# Altium PCB Motor_Control_PCB.PcbDoc
Units mil, origin at the board's own origin, x right, y up, seen from the top; angles counter-clockwise.
Board outline 3937.01 x 3018.63 mil, 2 copper layers (Top Layer, Bottom Layer); 22 components, 17 nets, 91 pads, 21 vias.
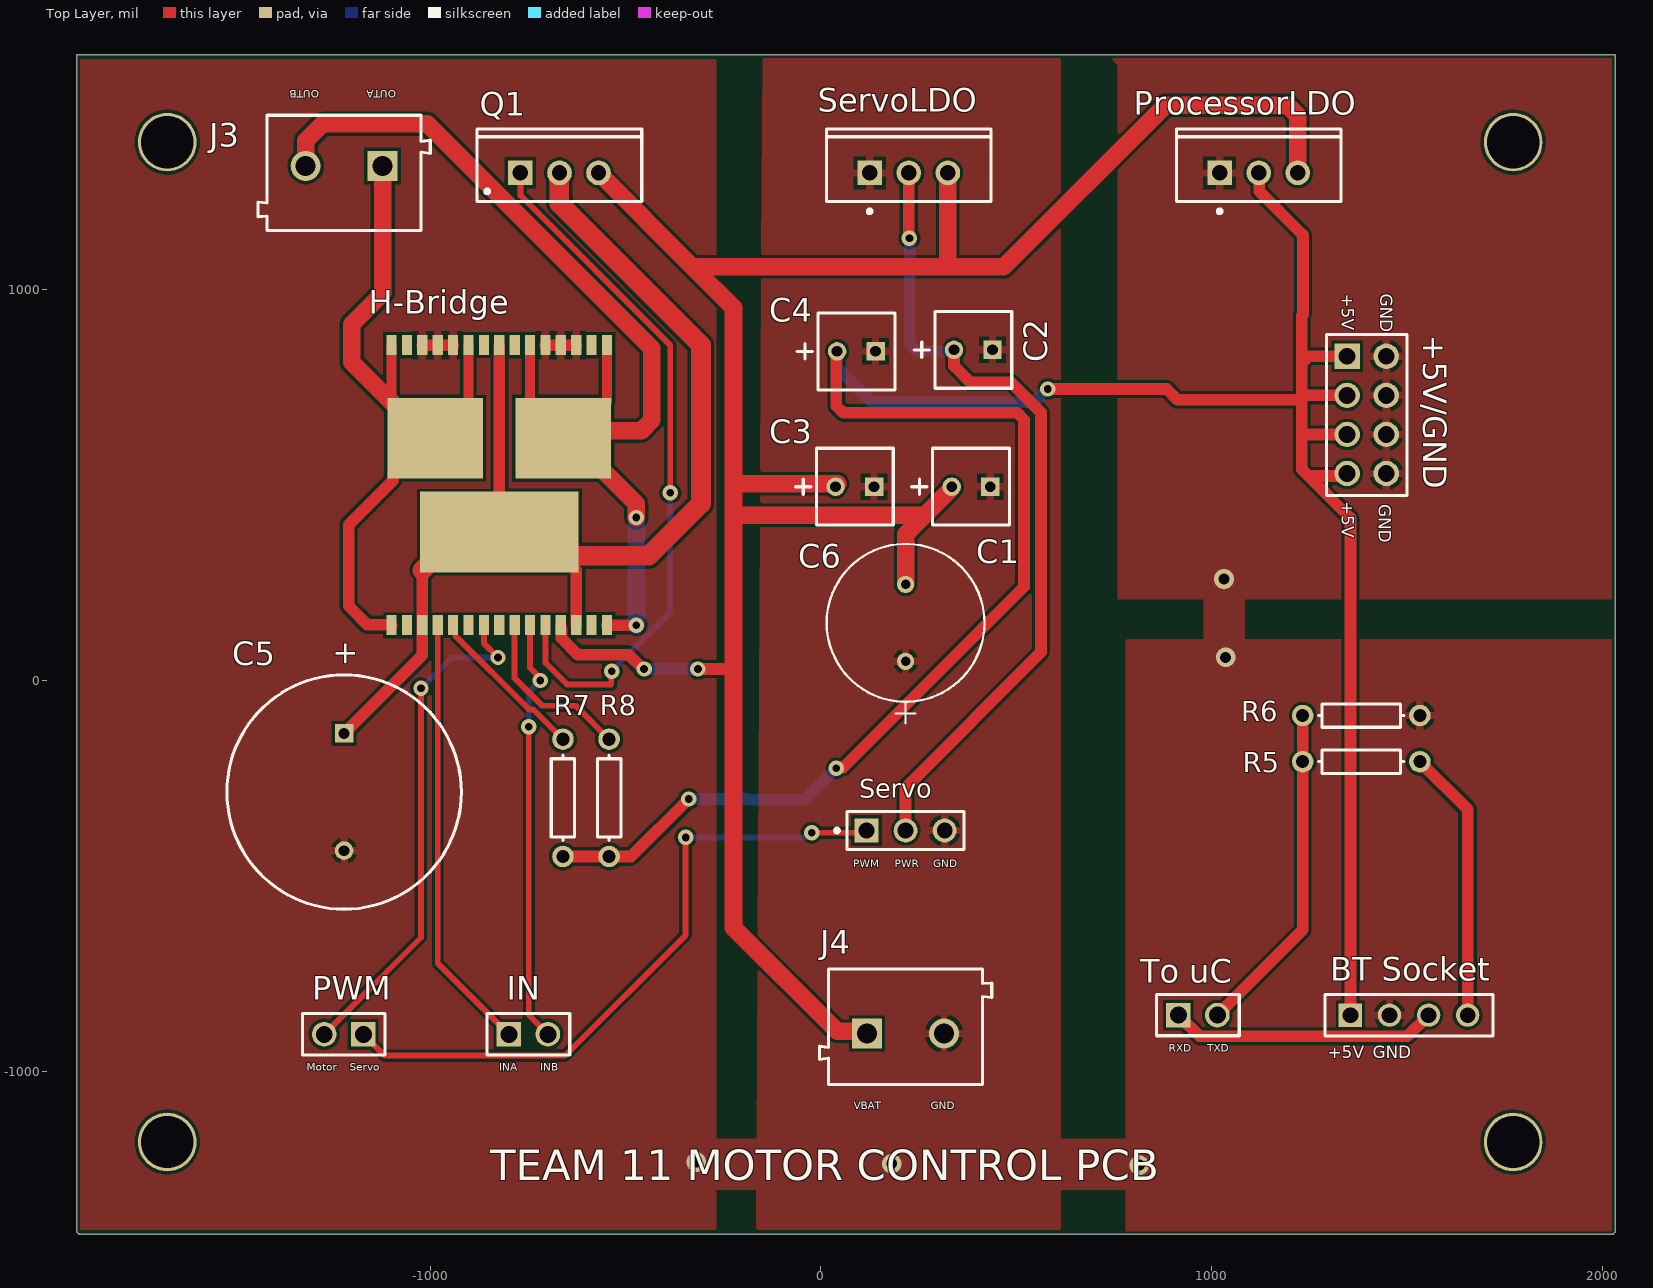
[diagram p0: Top Layer view]
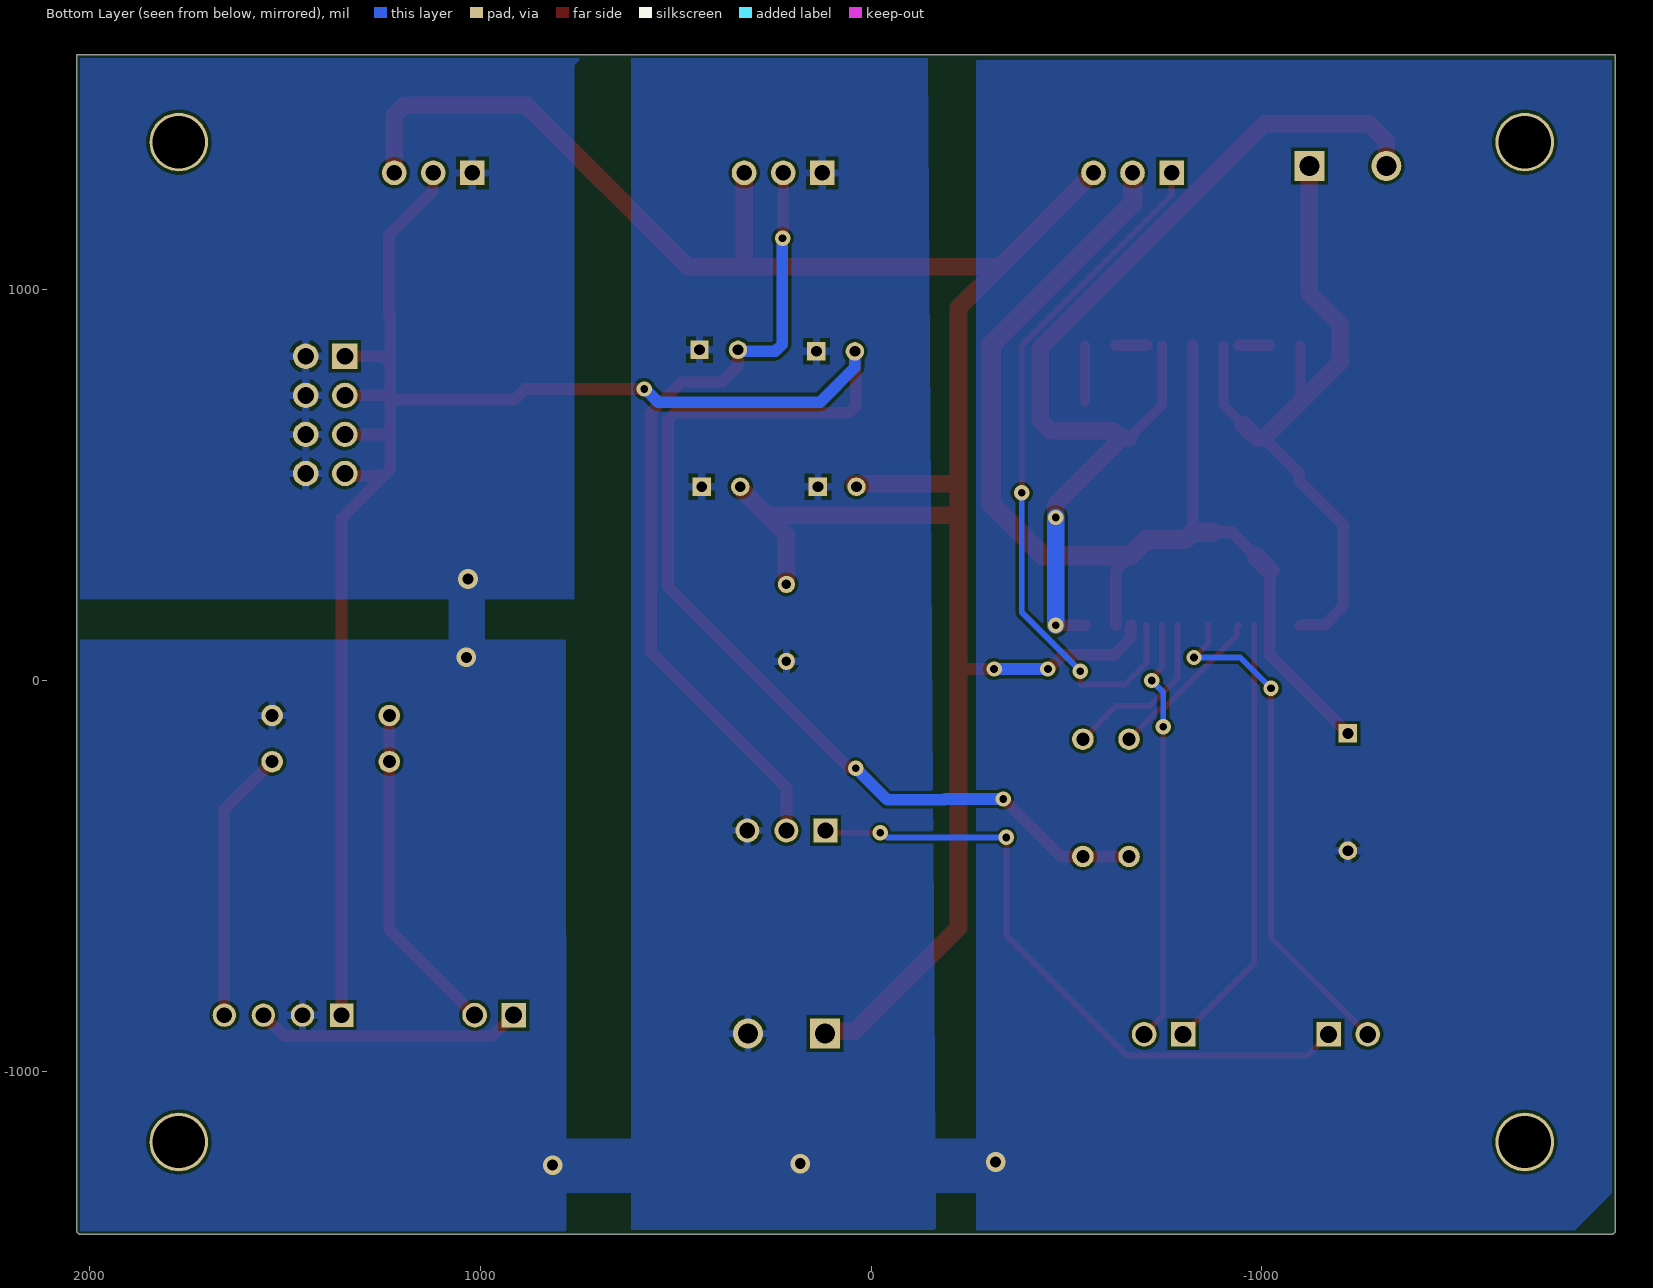
[diagram p1: Bottom Layer view, seen from below]
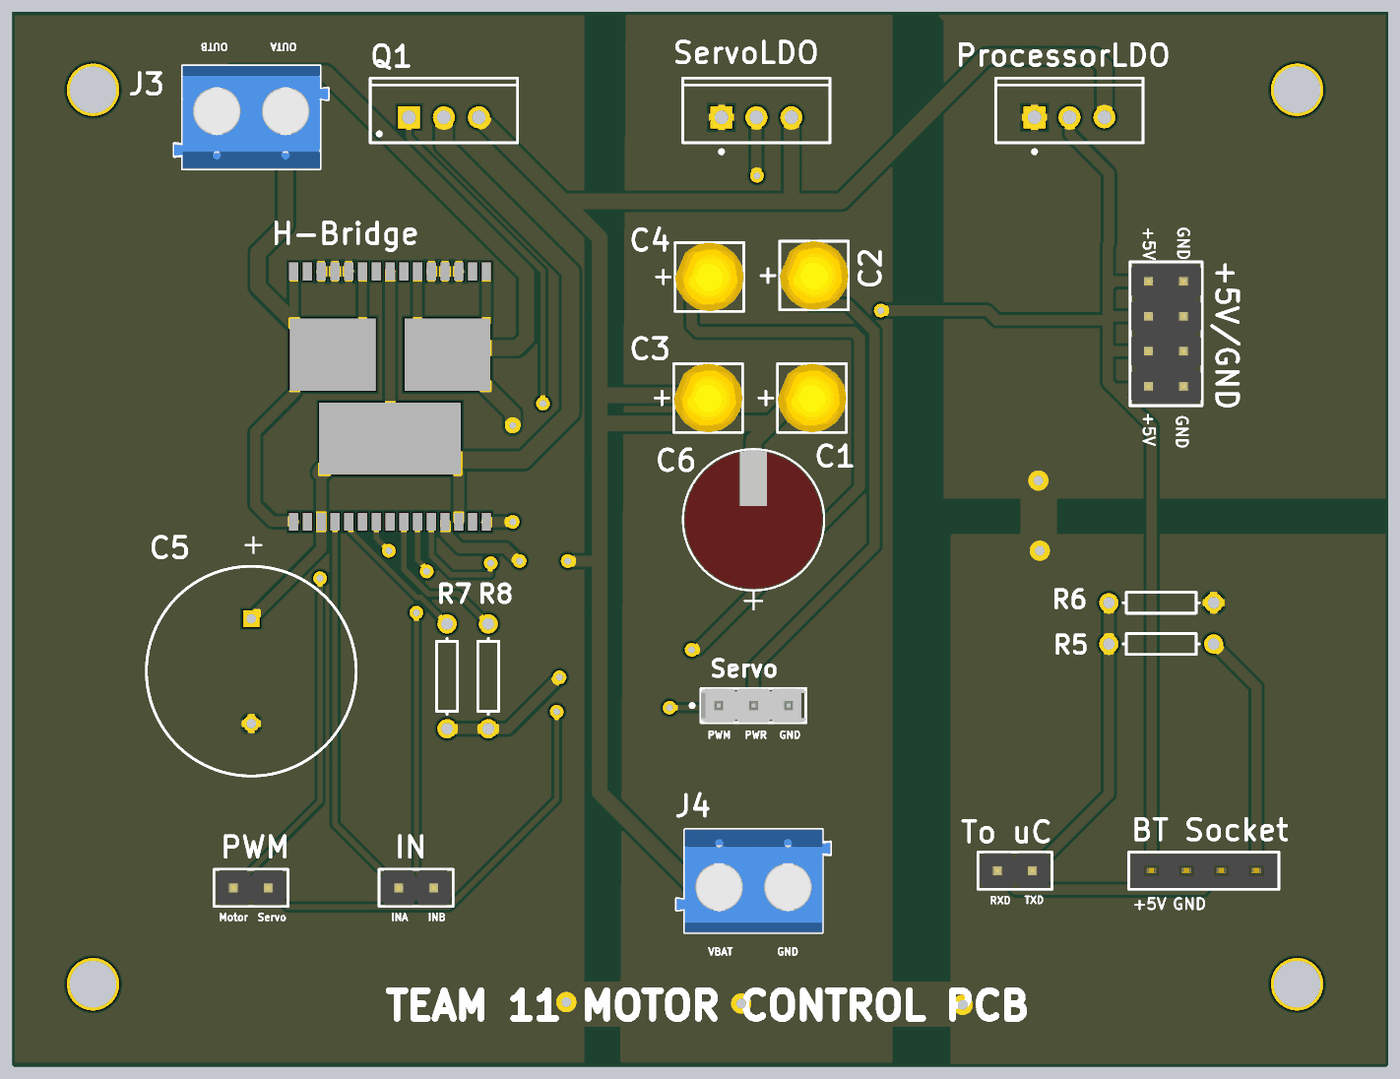
[diagram p2: 3D render of the assembled board from above, using the file's embedded part models]

## Layer stack, top to bottom
Top Solder: solder mask 0.4, Solder Resist, Dk 3.5
Top Layer: signal copper 1.4
Dielectric 1: dielectric 12.6, FR-4, Dk 4.8
Bottom Layer: signal copper 1.4
Bottom Solder: solder mask 0.4, Solder Resist, Dk 3.5

## Board outline
-1898.59,-1417.32 -1904.45,-1411.46 -1904.45,1601.31 2032.56,1601.31 2032.56,-1411.46 2026.7,-1417.32

## Design rules (kind name [scope] priority, off if disabled: settings)
BoardOutlineClearance [All] p1: gap=7.87 ignorepadtopadclearanceinfootprint=FALSE except(15.75: Arc-SplitBarrior Arc-SplitContinuation Track-SplitBarrior Track-SplitContinuation SMDPad-SplitBarrior SMDPad-SplitContinuation THPad-SplitBarrior THPad-SplitContinuation Via-SplitBarrior Via-SplitContinuation Fill-SplitBarrior Fill-SplitContinuation Poly-SplitBarrior Poly-SplitContinuation Region-SplitBarrior Region-SplitContinuation Text-SplitBarrior Text-SplitContinuation)
Clearance "Clearance Bottom Layer" [OnLayer('Bottom Layer')] p1: gap=8 ignorepadtopadclearanceinfootprint=TRUE except(10: Arc-Text Track-Text SMDPad-Text THPad-Text Via-Text Fill-Text Poly-Text Region-Text Text-Text)
Clearance "Clearance Top Layer" [OnLayer('Top Layer')] p2: gap=8 ignorepadtopadclearanceinfootprint=TRUE except(10: Arc-Text Track-Text SMDPad-Text THPad-Text Via-Text Fill-Text Poly-Text Region-Text Text-Text)
Clearance [All] p3: gap=7.87 ignorepadtopadclearanceinfootprint=FALSE except(3.5: Arc-Arc Arc-Track Arc-SMDPad Track-Track Track-SMDPad SMDPad-SMDPad; 5: Arc-Via Track-Via SMDPad-Via THPad-Via Via-Via; 10: Arc-Text Track-Text SMDPad-Text THPad-Text Via-Text Fill-Text Poly-Text Region-Text Text-Text)
HoleSize [All] p1: absolutevalues=TRUE maxlimit=248.03 minlimit=7.87 maxpercent=80.000 minpercent=20.000
MinimumAnnularRing [All] p1: minimumring=3
MinimumSolderMaskSliver [All] p1: minsoldermaskwidth=3.94
PolygonConnect PolygonConnect_1 [All] p1: thpad.connectstyle=Relief thpad.reliefconductorwidth=20 thpad.reliefentries=4 thpad.polygonreliefangle="90 Angle" thpad.airgapwidth=10 smdpad.connectstyle=Relief smdpad.reliefconductorwidth=20 smdpad.reliefentries=4 smdpad.polygonreliefangle="90 Angle" smdpad.airgapwidth=10 via.connectstyle=Direct via.reliefconductorwidth=20 via.reliefentries=4 via.polygonreliefangle="90 Angle" via.airgapwidth=10
RoutingCorners [All] p1: cornerstyle=Round minsetback=100 maxsetback=100
RoutingVias [All] p1: holewidth=19.68 width=39.37 viastyle="Through Hole" minholewidth=7.87 minwidth=17.72 maxholewidth=39.37 maxwidth=78.74
SilkToSilkClearance [All] p1: silktosilkclearance=3.94
SilkToSolderMaskClearance [IsPad] p1: minsilkscreentomaskgap=3.94 clearancetoexposedcopper=TRUE
SolderMaskExpansion [All] p1: expansion=4 istentingtop=FALSE
Width [All] p1: maxlimit=100 minlimit=3.5 preferedwidth=15
25 further rules are at their usual default settings.

## Components (designator, comment, footprint, x,y, rotation, side; value= is the part's Value field where it differs from the comment)
+5V/GND "61300821121" 61300821121 1396.85,679.92 r270 top
"BT Socket" "61300411821" 61300411821 1505.12,-856.3 r0 top
C1 "TAP106K016SCS" FP-TAP106K016SCS-MFG 383.86,496.06 r180 top
C2 "TAP106K016SCS" FP-TAP106K016SCS-MFG 389.76,846.46 r180 top
C3 "TAP106K016SCS" FP-TAP106K016SCS-MFG 86.61,496.06 r180 top
C4 "TAP106K016SCS" FP-TAP106K016SCS-MFG 90.55,842.52 r180 top
C5 "Cap Pol1" RB7.6-15 -1220.47,-285.43 r90 top value=1uF
C6 "MAL219055102E3" CAP_5102E3_VIS 216.54,49.21 r90 top
H-Bridge "H_Bridge Motor Driver" "H-bridge Motor Driver (Lab1)" -823.43,500 r0 top (schematic designator *1)
IN "61300211121" 61300211121 -748.82,-905.51 r0 top
J3 "691102710002" 691102710002 -1220.47,1299.21 r180 top
J4 "691102710002" 691102710002 216.54,-885.83 r0 top
ProcessorLDO "LM1084IT-5.0/NOPB" NDE0003A 1120.47,1299.21 r0 top
PWM "61300211121" 61300211121 -1221.26,-905.51 r180 top
Q1 "NMOS-2" TO-220AB -669.29,1299.21 r0 top
R5 "Res1" AXIAL-0.3 1382.87,-207.68 r0 top value=1K
R6 "Res1" AXIAL-0.3 1382.87,-89.57 r180 top value=2K
R7 "Res1" AXIAL-0.3 -660.43,-300.2 r270 top value=3.3K
R8 "Res1" AXIAL-0.3 -542.32,-300.2 r270 top value=3.3K
Servo "22-28-4033" MOLX-22-28-4033_V 216.54,-383.86 r0 top
ServoLDO "LM1084IT-5.0/NOPB" NDE0003A 224.8,1299.21 r0 top
"To uC" "61300211121" 61300211121 964.57,-856.3 r0 top

## Footprints (in the part's own frame and the unit in brackets; to place one, negate y for a bottom-side part, rotate by r counter-clockwise, add the part's x,y. Pads: shape width x height; smd on the part's side, far side on the other; paste and mask are expansions set on the pad)
61300211121 [mm] "Pin Header, pitch 2.54 mm, THT, Vertical, single row, 2p"
  rect 1.6x1.6 hole 1.1: 1(-1.27,0)
  round 1.6 hole 1.1: 2(1.27,0)
  silkscreen extent -2.69,-1.35 2.69,1.35, body extent -2.54,-1.27 2.54,1.27, height 8.57
61300411821 [mm] "Socket Header, Pitch 2.54 mm, THT, Vertical, single row, 4p"
  rect 1.52x1.52 hole 1.02: 1(-3.81,0)
  round 1.52 hole 1.02: 2(-1.27,0) 3(1.27,0) 4(3.81,0)
  silkscreen extent -5.46,-1.35 5.46,1.35, body extent -5.33,-1.25 5.33,1.25, height 8.55
61300821121 [mm] "Pin Header, pitch 2.54 mm, THT, Vertical, dual row, 8p"
  rect 1.65x1.65 hole 1.1: 1(-3.81,-1.27)
  round 1.65 hole 1.1: 2(-3.81,1.27) 3(-1.27,-1.27) 4(-1.27,1.27) 5(1.27,-1.27) 6(1.27,1.27) 7(3.81,-1.27) 8(3.81,1.27)
  silkscreen extent -5.23,-2.62 5.23,2.62, body extent -5.08,-2.54 5.08,2.54, height 8.59
691102710002 [mm] "5,00mm - modular - blue - Horizontal entry with pressure clamp - 9,9 mm height - 02p"
  rect 1.95x1.95 hole 1.3: 1(-2.5,-0.45)
  round 1.95 hole 1.3: 2(2.5,-0.45)
  silkscreen extent -5.6,-3.75 5.6,3.75, body extent -5.6,-3.75 5.6,3.75, height 9.96
AXIAL-0.3 [mm] "Axial Device, Thru-Hole; 2 Leads; 0.3 in Pin Spacing"
  round 1.4 hole 0.85: 1(-3.81,0) 2(3.81,0)
  silkscreen extent -2.77,-0.76 2.77,0.76
CAP_5102E3_VIS [mil]
  round 44 hole 24 mask+0: 1(0,0) 2(196.85,0)
  silkscreen extent -159,-202 300,202, body extent -99,-197 296,197, height 788
FP-TAP106K016SCS-MFG [mm]
  rect 1.2x1.2 hole 0.7 paste-1000 mask+0: 1(-1.25,0)
  round 1.2 hole 0.7 paste-1000 mask+0: 2(1.25,0)
  silkscreen extent -2.5,-2.5 3.85,2.5, body extent -2.6,-2.6 2.6,2.6, height 0.25
"H-bridge Motor Driver (Lab1)" [mm]
  rect 0.665x1.3 smd: CP(3,-9.1) CS(0,-9.1) CS_DIS(-2,-9.1) EN_A/DIAG_A(-3,-9.1) EN_B/DIAG_B(1,-9.1) GND_A(-5,9.1) GND_A(-4,9.1) GND_A(-3,9.1) GND_B(3,9.1) GND_B(4,9.1) GND_B(5,9.1) IN_A(-4,-9.1) IN_B(2,-9.1) NC(-6,-9.1) NC(-6,9.1) NC(-1,9.1) NC(1,9.1) NC(6,-9.1) NC(6,9.1) OUT_A(-7,-9.1) OUT_A(-7,9.1) OUT_A(-2,9.1) OUT_B(2,9.1) OUT_B(7,-9.1) OUT_B(7,9.1) PWM(-1,-9.1) VBAT(4,-9.1) VCC(-5,-9.1) VCC(0,9.1) VCC(5,-9.1)
  rect 6.23x5.25 smd: OUT_A(-4.165,3.05) OUT_B(4.165,3.05)
  rect 10.3x5.25 smd: VCC(0,-3.05)
  body extent -8.61,-9 8.6,9, height 2.35
MOLX-22-28-4033_V [mm] "THD, 3-Leads, Body 7.62x2.49mm, Pitch 2.54mm"
  rect 1.55x1.55 hole 1.02: 1(-2.54,0)
  round 1.55 hole 1.02: 2(0,0) 3(2.54,0)
  silkscreen extent -4.58,-1.24 3.81,1.24, body extent -3.81,-1.24 3.81,1.24, height 8.38
NDE0003A [mm] "FM, 3-Leads, Body 10.7x4.7mm, Pitch 2.54mm"
  rect 1.6x1.6 hole 1: 1(-2.54,0)
  round 1.6 hole 1: 2(0,0) 3(2.54,0)
  silkscreen extent -5.35,-2.62 5.35,2.85, body extent -5.4,-1.9 5.4,2.9, height 19.4
RB7.6-15 [mm] "Polarized Capacitor (Radial); 2 Leads"
  rect 1.2x1.2 hole 0.7: 1(3.81,0)
  round 1.2 hole 0.7: 2(-3.81,0)
  silkscreen extent -7.62,-7.62 7.62,7.62
TO-220AB [mm] "TO, Thru-Hole, Vertical, Heatsink Mounted; 3 In-Line Leads; Pitch 2.54 mm"
  rect 1.6x1.6 hole 1: 1(-2.54,0)
  round 1.6 hole 1: 2(0,0) 3(2.54,0)
  silkscreen extent -5.35,-1.85 5.35,2.85, body extent -5.4,-1.9 5.4,2.9, height 19.3

## Part data
+5V/GND: library part CMP-1502-01078-1, "THT Vertical Pin Header WR-PHD, Pitch 2.54 mm, Dual Row, 8 pins", Contact Resistance=20mOhm, Manufacturer="Wurth Elektronik", Operating Temperature=-40to105degC, Rated Current=3A, Withstanding Voltage=500VAC, Working Voltage=250VAC, Datasheet URL=https://katalog.we-online.de/em/datasheet/6130xx21121.pdf, Gender=Male, Manufacturer URL=http://www.we-online.de, Mounting Technology=THT, Orientation=Vertical, Package Reference=61300821121, Packaging=Bag, Part Number=61300821121, Pin Number=8, Pitch=2.54mm, Publisher=WurthElektronik, Row Number=Dual
"BT Socket": library part CMP-1502-01316-1, "THT Vertical Socket Header WR-PHD, Pitch 2.54 mm, Single Row, 4 pins", Contact Resistance=20mOhm, Manufacturer="Wurth Elektronik", Operating Temperature=-40to125degC, Rated Current=3A, Withstanding Voltage=500VAC, Working Voltage=250VAC, Datasheet URL=https://katalog.we-online.de/em/datasheet/6130xx11821.pdf, Gender=Female, Manufacturer URL=http://www.we-online.de, Mounting Technology=THT, Orientation=Vertical, Package Reference=61300411821, Packaging=Tray, Part Number=61300411821, Pin Number=4, Pitch=2.54mm, Publisher=WurthElektronik, Row Number=Single
C1 C2 C3 C4: library part CMP-04424-000616-1, "CAP TANT 10UF 10% 16V RADIAL", Capacitance=10uF, Case/Package=Dipped, Dielectric Material=Tantalum, ESR (Equivalent Series Resistance)=3.2R, Leakage Current=1.2uA, Max Operating Temperature=125°C, Min Operating Temperature=-55°C, Package Quantity=1000, Tolerance=10%, Voltage=16V, Construction=RADIAL, Diameter=5mm, Dissipation Factor=8%, Features="General Purpose", Height=9mm, Height - Seated (Max)=0.354inch, Lead Diameter=0.5mm, Lead Free="Lead Free", Lead Pitch=2.5mm, Length=9mm, Life (Hours)=1000Hour, Mount="Through Hole", Number of Pins=2, Packaging=Bulk, Polarity=Polar, Radiation Hardening=No, RoHS Compliant=Yes, Series=TAP, Size=9mm, Termination=Radial, Voltage Rating=16V, Voltage Rating (DC)=16V
C5: "Polarized Capacitor (Radial)", LatestRevisionDate=17-Jul-2002, LatestRevisionNote="Re-released for DXP Platform.", PackageDescription="Polarized Capacitor (Radial); 2 Leads", PackageReference=RB7.6-15, Published=8-Jun-2000, Publisher="Altium Limited"
C6: "No Description Available", Mfr_Name=Vishay, Copyright="Copyright (C) 2023 Ultra Librarian. All rights reserved.", Manufacturer_Part_Number=MAL219055102E3, RefDes=RefDes, Type=DEV
H-Bridge: "The VHN5019A-E is a full bridge motor driver / intended for a wide range of automotive / applications"
IN PWM "To uC": library part CMP-1712-00002-4, "THT Vertical Pin Header WR-PHD, Pitch 2.54 mm, Single Row, 2 pins", Contact Resistance=20mOhm, Manufacturer="Wurth Elektronik", Operating Temperature=-40to105degC, Rated Current=3A, Withstanding Voltage=500VAC, Working Voltage=250VAC, Datasheet URL=https://katalog.we-online.de/em/datasheet/6130xx11121.pdf, Gender=Male, Manufacturer URL=http://www.we-online.de, Mounting Technology=THT, Orientation=Vertical, Package Reference=61300211121, Packaging=Bag, Part Number=61300211121, Pin Number=2, Pitch=2.54mm, Publisher=WurthElektronik, Row Number=Single
J3 J4: library part CMP-1502-03258-1, "Series 102 - 5.00 mm Horizontal Entry Modular with Pressure Clamp WR-TBL, 2 pin", Manufacturer="Wurth Elektronik", Operating Temperature=-40to105degC, Datasheet URL=http://katalog.we-online.de/em/datasheet/6911027100xx.pdf, Manufacturer URL=http://www.we-online.de, Mounting Technology=THT, Package Reference=691102710002, Packaging=Box, Part Number=691102710002, Pin Number=2, Pitch=5.00mm, Publisher=WurthElektronik
ProcessorLDO ServoLDO: library part CMP-0062-02537-3, "5A Low Dropout Positive Regulators, 3-pin TO-220, Pb-Free", Manufacturer="Texas Instruments", PackageTopMarking=NSUZXYTTE#*LM1084*IT-5.0, PowerWise=N, ComponentLink1Description="Datasheet URL", ComponentLink1URL=http://www.ti.com/general/docs/lit/getliterature.tsp?genericPartNumber=LM1084&fileType=pdf, CompType="LDO IC", PackageDescription="TO-220, Molded, 3 Lead, Straight", PackageReference=NDE0003A, PinCount=3, RoHS=Y
Q1: "N-Channel Power MOSFET", ComponentLink1Description="Manufacturer Link", ComponentLink1URL=http://www.irf.com/, DatasheetVersion=PD-9.814, LatestRevisionDate=17-Jul-2002, LatestRevisionNote="Re-released for DXP Platform.", Note="Pin 2 is electrically connected to pin 4.", PackageDescription="TO, Thru-Hole, Vertical, Heatsink Mounted; 3 In-Line Leads; Pitch 2.54 mm", PackageReference=TO-220AB, PackageVersion=Feb-1997, Published=8-Jun-2000, Publisher="Altium Limited"
R5 R6 R7 R8: "Resistor", LatestRevisionDate=17-Jul-2002, LatestRevisionNote="Re-released for DXP Platform.", PackageDescription="Axial Device, Thru-Hole; 2 Leads; 0.3 in Pin Spacing", PackageReference=AXIAL-0.3, Published=8-Jun-2000, Publisher="Altium Limited"
Servo: library part CMP-1676-00001-5, "Male Header, Pitch 2.54 mm, 1 x 3 Position, Height 8.38 mm, Tail Length 3.18 mm, RoHS, Bulk", Colour=Black, Current Rating="4 A", Manufacturer=Molex, Max Operating Temperature="75 degC", Min Operating Temperature="0 degC", Package Quantity=1, Voltage Rating="250 V", ComponentLink1Description="Manufacturer URL", ComponentLink1URL=http://www.molex.com/, ComponentLink2Description=Datasheet, ComponentLink2URL=http://www.molex.com/pdm_docs/sd/022284033_sd.pdf, Contact Finish=Gold, Contact Material=Brass, Contact Plating=Gold, DatasheetVersion="Rev. G, 01/2012", Height="8.38 mm", Lead Pitch="0.1 inch", Length="7.62 mm", Mount="Through Hole", Mounting Technology="Through Hole", PackageDescription="Male Header, Pitch 2.54 mm, 1 x 3 Position, Height 8.38 mm, Tail Length 3.18 mm", PackageReference=22-28-4033, Packaging=Bulk, Pins=3, REACH SVHC=Unknown, RoHSCompliant=true, Rows=1

## Free pads (board coordinates)
  round 150 hole 133.86: 15(-1673.23,1377.95) 16(1771.65,1377.95) 17(-1673.23,-1181.1) 18(1771.65,-1181.1)

## Via types
v1: diameter 39.37, hole 19.68, Top Layer to Bottom Layer, 16 vias
v2: diameter 50, hole 28, Top Layer to Bottom Layer, 5 vias

## Nets (pads, with @x,y where several pads share a name; then routed paths per layer and width w, separated by ;. In a path a pad name is that pad's centre, name@x,y a point inside that pad or via, vN(x,y) a via of type N, cw(c..) or ccw(c..) an arc to the next point about the centre after c; other vN are vias at no path point)
CP: H-Bridge.CP Q1.1 | length 1818.3
  Top Layer w15: Q1.1 -769.29,1241.73 -385.83,858.27 v1(-385.83,480.32) ; H-Bridge.CP -705.32,45.32 -650.15,-9.84 -536.69,-9.84 -536.69,22.37 v1(-535.43,23.62)
  Bottom Layer w15: v1(-535.43,23.62) -535.43,25 -385.83,174.61 v1(-385.83,480.32)
GND: "BT Socket.2" +5V/GND.2 +5V/GND.4 +5V/GND.6 +5V/GND.8 C1.1 C2.1 C3.1 C4.1 C5.2 C6.1 H-Bridge.GND_A H-Bridge.GND_B J4.2 ProcessorLDO.1 R6.1 Servo.3 ServoLDO.1 | length 157.5
  Top Layer w30: H-Bridge.GND_A@-1020.28,858.27 -980.91,858.27 H-Bridge.GND_A@-941.54,858.27 ; H-Bridge.GND_B@-705.32,858.27 -665.94,858.27 H-Bridge.GND_B@-626.57,858.27
  other v2: 814.96,-1240.16 181.1,-1236.22 -318.9,-1232.28 1035.43,59.06 1031.5,259.84
GPIO1(IN_A): H-Bridge.IN_A IN.1 | length 1122.7
  Top Layer w15: H-Bridge.IN_A -980.91,-723.43 IN.1
GPIO2(IN_B): H-Bridge.IN_B IN.2 | length 1090.7
  Top Layer w15: v1(-748.03,-118.11) -748.03,-856.3 IN.2 ; H-Bridge.IN_B -744.68,32.78 -718.5,6.59 v1(-718.5,0)
  Bottom Layer w15: v1(-748.03,-118.11) -748.03,-30.13 -718.5,-0.6 v1(-718.5,0)
MotorPWM: H-Bridge.PWM PWM.2 | length 1315.5
  Top Layer w15: PWM.2 -1023.62,-657.87 v1(-1023.62,-19.68) ; H-Bridge.PWM -862.8,95.08 v1(-826.77,59.06)
  Bottom Layer w15: v1(-1023.62,-19.68) -944.88,59.06 v1(-826.77,59.06)
Net*1_EN_A/DIAG_A: H-Bridge.EN_A/DIAG_A R7.1 | length 414.5
  Top Layer w15: H-Bridge.EN_A/DIAG_A -935.94,136.14 -935.94,114.91 -746.94,-74.09 -736.54,-74.09 R7.1
Net*1_EN_B/DIAG_B: H-Bridge.EN_B/DIAG_B R8.1 | length 442.2
  Top Layer w15: H-Bridge.EN_B/DIAG_B -784.06,5.95 -742.92,-35.19 -713.51,-64.59 -627.93,-64.59 R8.1
Net*1_OUT_A: H-Bridge.OUT_A J3.1 | length 1891.4
  Top Layer w25: H-Bridge.OUT_A@-1099.02,712.4 H-Bridge.OUT_A@-1099.02,858.27 ; H-Bridge.OUT_A@-953.43,654.06 -902.17,705.31 H-Bridge.OUT_A@-902.17,858.27
  Top Layer w30: H-Bridge.OUT_A@-1099.02,141.73 -1100.35,143.07 -1160.93,143.07 -1208.66,190.8 -1208.66,398.82 -1095.04,512.44 -1095.04,531.73 -1006.69,620.08 H-Bridge.OUT_A@-987.4,620.08
  Top Layer w45: J3.1 -1122.05,990.78 -1200.79,912.04 -1200.79,814.17 -1099.02,712.4 H-Bridge.OUT_A@-1006.69,620.08 ; H-Bridge.OUT_A@-987.4,620.08 H-Bridge.OUT_A@-953.43,654.06
Net*1_OUT_B: H-Bridge.OUT_B J3.2 | length 2679.1
  Top Layer w25: H-Bridge.OUT_B@-744.68,858.27 -744.68,705.31 H-Bridge.OUT_B@-659.45,620.08 ; H-Bridge.OUT_B@-547.83,712.4 H-Bridge.OUT_B@-547.83,858.27
  Top Layer w30: H-Bridge.OUT_B@-547.83,141.73 v1(-472.44,141.73)
  Top Layer w45: J3.2 -1318.9,1381.89 -1275.59,1425.2 -1007.87,1425.2 -433.07,850.39 -433.07,666.12 -459.43,639.76 -620.47,639.76 H-Bridge.OUT_B@-640.16,620.08 ; H-Bridge.OUT_B@-659.45,620.08 H-Bridge.OUT_B@-640.16,620.08 ; v1(-472.44,417.32) -472.44,452.36 H-Bridge.OUT_B@-640.16,620.08
  Bottom Layer w45: v1(-472.44,141.73) v1(-472.44,417.32)
"NetBT Socket_3": "BT Socket.3" "To uC.1" | length 685.7
  Top Layer w30: 914.57,-856.3 969.06,-910.8 1500.62,-910.8 1555.12,-856.3
"NetBT Socket_4": "BT Socket.4" R5.2 | length 699.3
  Top Layer w30: R5.2 1655.12,-329.92 1655.12,-856.3
NetR5_1: "To uC.2" R5.1 R6.2 | length 857.2
  Top Layer w30: 1014.57,-856.3 1232.87,-637.99 R5.1 R6.2
"Processor 5V": "BT Socket.1" +5V/GND.1 +5V/GND.3 +5V/GND.5 +5V/GND.7 C4.2 ProcessorLDO.2 R7.2 R8.2 | length 6539.7
  Top Layer w30: R7.2 -485.63,-450.2 v1(-338.58,-303.15) ; v1(39.37,-224.41) 41.16,-222.62 56.91,-222.62 519.68,240.16 519.68,667.47 502.11,685.04 56.94,685.04 39.37,702.61 C4.2@39.37,842.52 ; v1(580.68,746.19) 884.67,746.19 912.36,718.5 1230.31,718.5 ; ProcessorLDO.2 1121.73,1297.96 1121.73,1252.29 1233.63,1140.39 1233.63,937.04 1230.31,933.73 1230.31,812.35 ; +5V/GND.7 1340.16,523.23 1247.89,523.23 ; +5V/GND.5 1230.31,629.92 ; +5V/GND.3 1238.58,729.92 1230.31,738.19 ; +5V/GND.1 1247.89,829.92 1230.31,812.35 ; 1355.12,-856.3 1355.12,416 1247.89,523.23 ; 1230.31,629.92 1230.31,718.5 ; 1230.31,629.92 1230.31,540.81 1247.89,523.23 ; 1230.31,718.5 1230.31,738.19 ; 1230.31,738.19 1230.31,812.35
  Bottom Layer w30: v1(-338.58,-303.15) -189.68,-303.15 -187.71,-305.12 -41.34,-305.12 v1(39.37,-224.41) ; C4.2 41.34,801.18 129.92,712.6 544.55,712.6 578.15,746.19 v1(580.68,746.19)
PWR: C2.2 Servo.2 ServoLDO.2 | length 2082
  Top Layer w30: Servo.2 216.54,-274.25 562.99,72.21 562.99,687.01 486.22,763.78 381.89,763.78 340.55,805.12 C2.2 ; ServoLDO.2 224.8,1133.46 v1(226.38,1131.89)
  Bottom Layer w30: v1(226.38,1131.89) 227.36,1130.91 227.36,860.09 244.94,842.52 324.42,842.52 325.06,843.16 333.66,843.16 C2.2@334.29,842.52
ServoPWM: PWM.1 Servo.1 | length 1695.5
  Top Layer w15: PWM.1 -1116.76,-960.01 -654.89,-960.01 -346.46,-651.57 v1(-346.46,-401.57) ; v1(-23.62,-389.76) 110.63,-389.76 Servo.1
  Bottom Layer w15: v1(-346.46,-401.57) -42.03,-401.57 -30.22,-389.76 v1(-23.62,-389.76)
VBAT: C1.2 C3.2 C6.2 H-Bridge.VBAT J4.1 ProcessorLDO.3 Q1.3 ServoLDO.3 | length 6193.3
  Top Layer w30: H-Bridge.VBAT -665.94,133.05 -664.04,131.14 -664.04,107.98 -622.36,66.31 -492.07,66.31 -455.29,29.53 v1(-452.76,29.53) ; v1(-314.96,29.53) -223.87,29.53
  Top Layer w45: Q1.3 -328.94,1058.86 ; C3.2@42.85,503.94 -223.87,503.94 ; J4.1 112.43,-897.86 41.56,-897.86 -223.87,-632.43 -223.87,29.53 -223.87,423.23 ; C6.2 216.54,374.02 263,420.48 C1.2@329.3,486.78 ; 260.25,423.23 -223.87,423.23 ; ServoLDO.3 324.8,1058.86 ; ProcessorLDO.3 1220.47,1446.08 1194.11,1472.44 881.89,1472.44 468.31,1058.86 324.8,1058.86 ; -328.94,1058.86 324.8,1058.86 ; -328.94,1058.86 -223.87,953.79 -223.87,503.94 ; -223.87,423.23 -223.87,503.94
  Bottom Layer w30: v1(-452.76,29.53) v1(-314.96,29.53)
VCC: C5.1 H-Bridge.VCC Q1.2 | length 3120.5
  Top Layer w30: C5.1 -1020.28,64.76 -1020.28,141.73 H-Bridge.VCC@-1020.28,282.48 ; H-Bridge.VCC@-1001.18,301.57 -922.83,379.92 H-Bridge.VCC@-874.41,379.92 ; H-Bridge.VCC@-823.43,379.92 H-Bridge.VCC@-823.43,858.27 ; H-Bridge.VCC@-662.99,318.9 -626.57,282.48 H-Bridge.VCC@-626.57,141.73
  Top Layer w50: H-Bridge.VCC@-1020.28,282.48 H-Bridge.VCC@-987.8,314.96 ; H-Bridge.VCC@-874.41,379.92 -823.43,379.92 H-Bridge.VCC@-805.33,361.82 ; Q1.2 -669.29,1220.47 -307.09,858.27 -307.09,452.76 -440.94,318.9 -662.99,318.9 H-Bridge.VCC@-705.92,361.82 ; H-Bridge.VCC@-805.33,361.82 H-Bridge.VCC@-705.92,361.82 ; H-Bridge.VCC@-805.33,361.82 H-Bridge.VCC@-705.92,361.82
pads on no net: H-Bridge.CS H-Bridge.CS_DIS H-Bridge.NC

## Polygon pours and split planes (outlines as drawn)
GND on Top Layer "GND_L01_P008" (solid, pour order 8): 740.16,1594.49 759.84,1574.8 759.84,208.66 2026.7,208.66 2026.7,1594.49
GND on Top Layer "GND_L01_P000" (solid, pour order 0): -1902.54,1590.55 -267.72,1590.55 -267.72,-1409.45 -271.65,-1405.51 -1898.61,-1405.51
GND on Top Layer "GND_L01_P002" (solid, pour order 2): -149.61,1590.55 -145.67,1594.49 614.17,1594.49 614.17,-1405.51 -165.35,-1405.51
GND on Top Layer "GND_L01_P006" (solid, pour order 6): 779.53,102.36 783.46,106.3 2026.7,106.3 2026.7,-1409.45 779.53,-1409.45
GND on Top Layer "GND_L01_P011" (solid, pour order 11): -485.53,-1173.23 1035.43,-1173.23 1035.43,-1303.15 -487.22,-1303.15
GND on Top Layer "GND_L01_P012" (solid, pour order 12): 980.32,295.28 1084.65,295.28 1084.65,19.68 980.32,19.68
GND on Bottom Layer "GND_L02_P009" (solid, pour order 9): 2032.56,1594.49 2032.56,209.72 2031.5,208.66 759.84,208.66 759.84,1574.8 740.16,1594.49
GND on Bottom Layer "GND_L02_P001" (solid, pour order 1): -1902.54,1587.01 -271.25,1587.01 -269.69,1588.58 -269.69,-1407.48 -1801.18,-1407.48 -1898.73,-1309.93
GND on Bottom Layer "GND_L02_P010" (solid, pour order 10): -519.68,-1173.23 1000,-1173.23 1000,-1311.02 -521.47,-1311.02
GND on Bottom Layer "GND_L02_P007" (solid, pour order 7): 781.5,104.33 1840.55,104.33 2026.7,104.33 2026.7,-1409.45 779.53,-1409.45
GND on Bottom Layer "GND_L02_P003" (solid, pour order 3): -145.67,1594.49 614.17,1594.49 614.17,-1405.51 -165.35,-1405.51
GND on Bottom Layer "GND_L02_P013" (solid, pour order 13): 988.19,295.28 1080.71,295.28 1080.71,15.75 988.19,15.75

## Silkscreen, mask and mechanical layers (free items; w line width, h text height)
Top Overlay:
  text "OUTB" at -1284.53,1510.75 h20 r180
  text "OUTA" at -1087.68,1510.75 h20 r180
  text "PWM" at 82.17,-477.28 h20
  text "PWR" at 188.46,-477.28 h20
  text "GND" at 286.89,-477.28 h20
  text "TXD" at 989.25,-949.72 h20
  text "RXD" at 889.84,-950.71 h20
  text "Motor" at -1315.87,-998.94 h20
  text "Servo" at -1205.63,-998.94 h20
  text "INA" at -823.15,-998.74 h20
  text "INB" at -718.15,-998.74 h20
  text "VBAT" at 83.74,-1097.36 h20
  text "GND" at 280.59,-1097.36 h20
  text "TEAM 11 MOTOR CONTROL PCB" at -846.46,-1279.53 h78.74

## Text inside footprints (layer, text, board x,y; h text height)
+5V/GND: Top Overlay "GND" at 1427.17,451.18 h31.5 r270; Top Overlay "+5V" at 1332.68,459.06 h31.5 r270; Top Overlay "GND" at 1431.1,990.55 h31.5 r270; Top Overlay "+5V" at 1332.68,990.55 h31.5 r270
"BT Socket": Top Overlay "GND" at 1411.81,-966.54 h31.5; Top Overlay "+5V" at 1297.64,-966.54 h31.5
C5: Top Overlay "+" at -1191.46,34.72 h59.06 r90